# EAGLE board wheel_board_front (EAGLE 9.5.0)
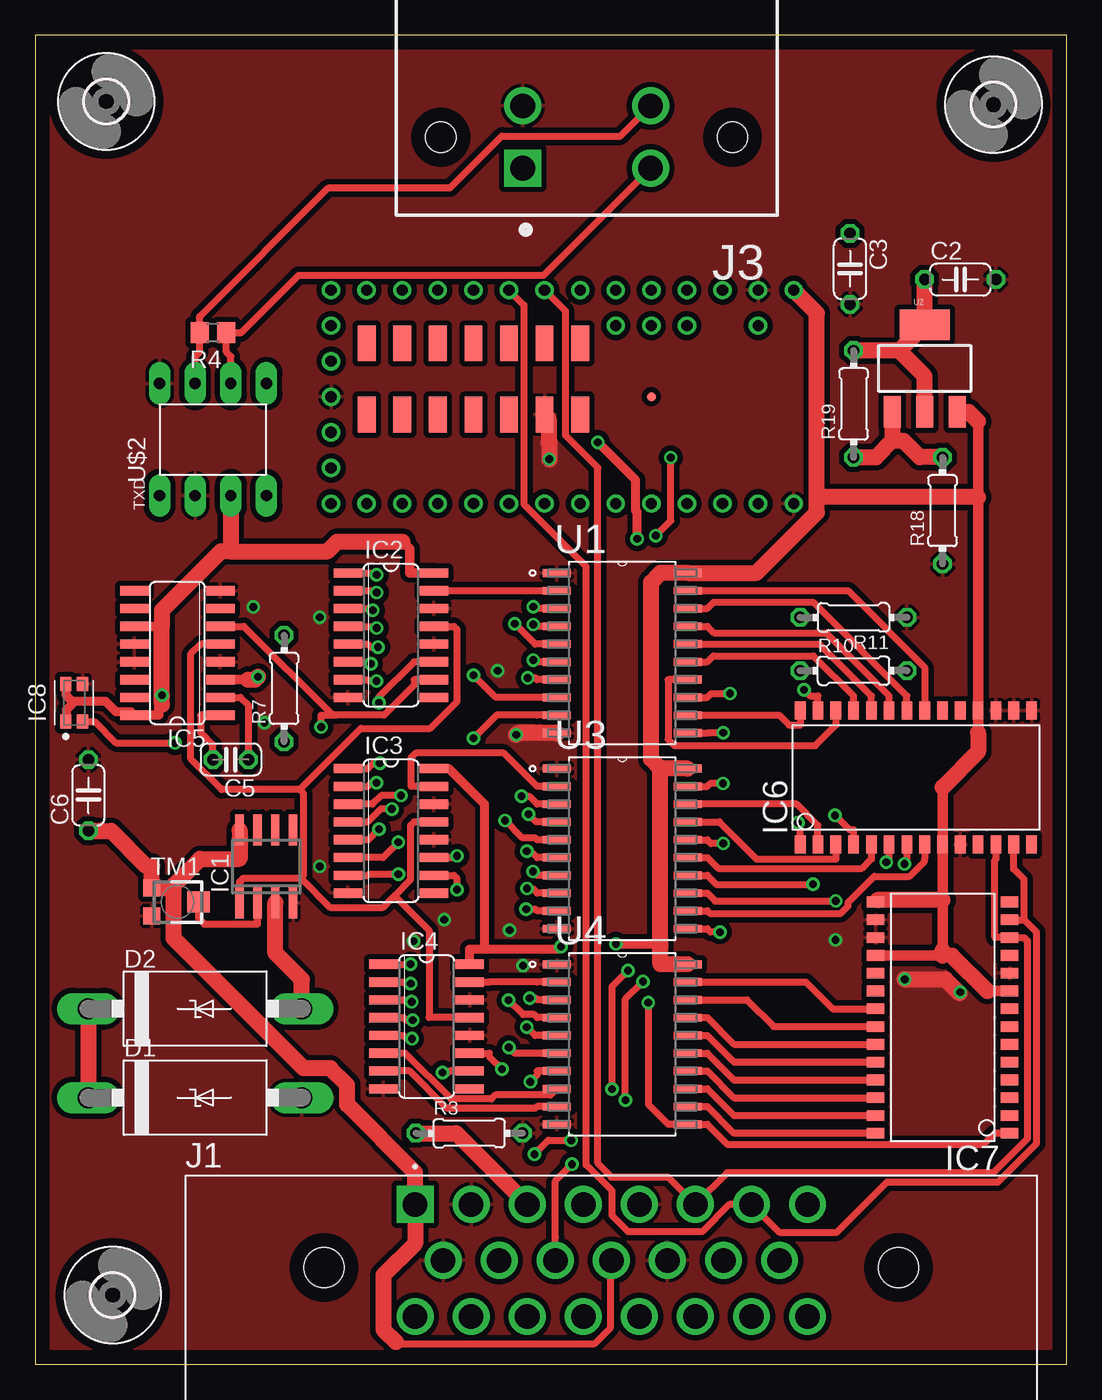
[diagram p0: board, top side]
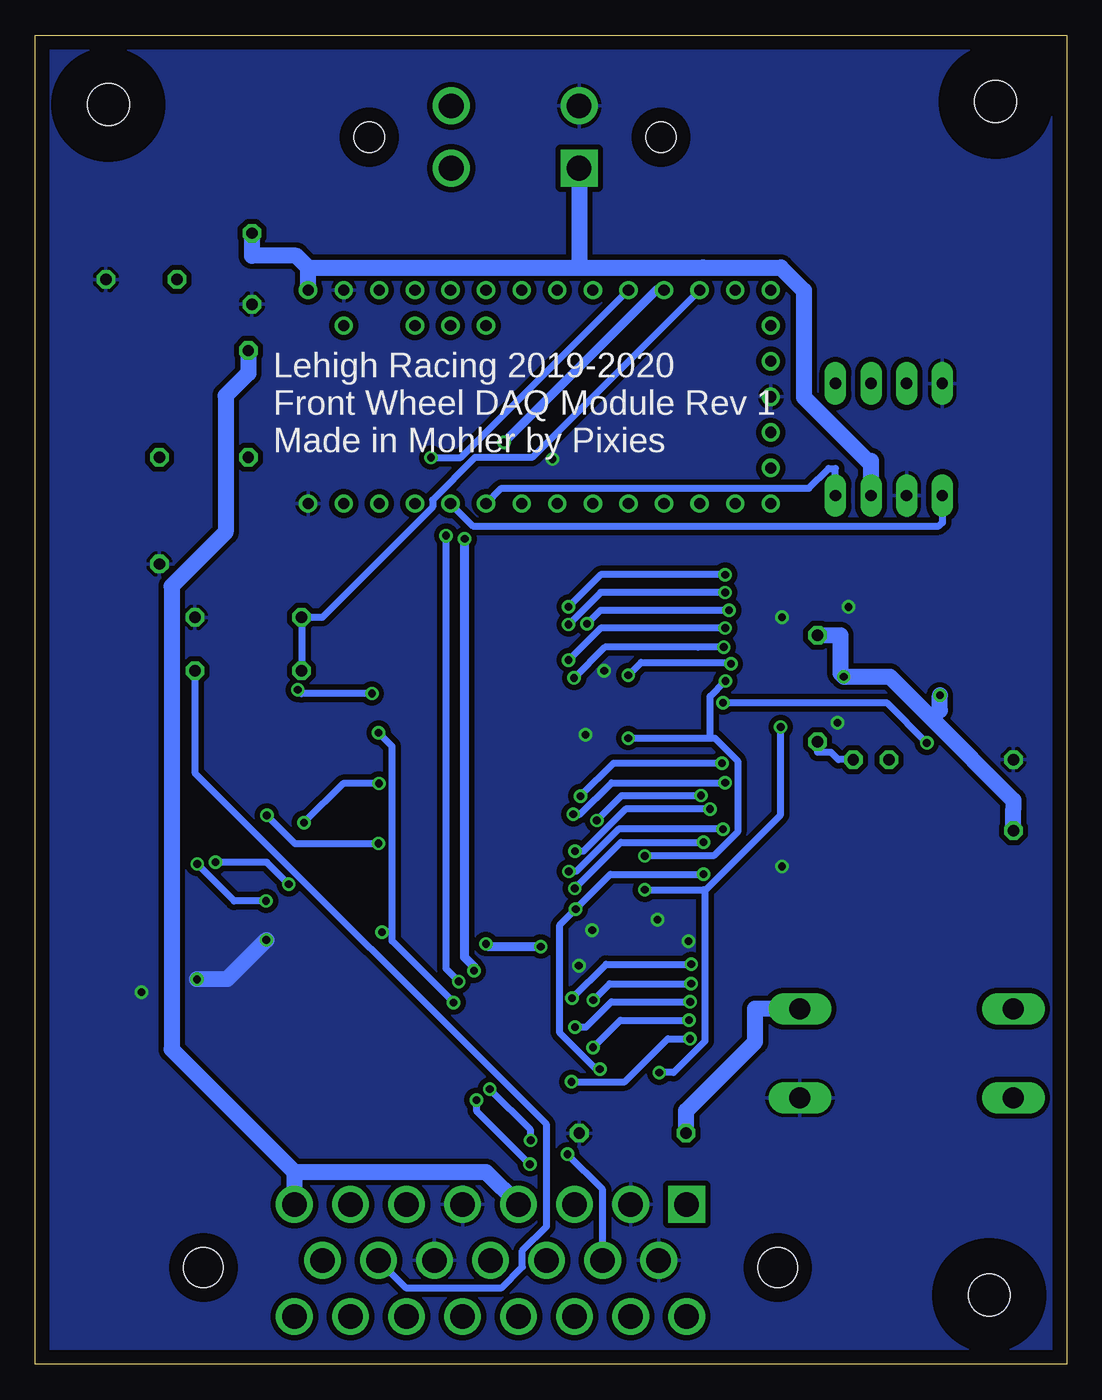
[diagram p1: board, bottom side, seen from below]

Size 73.64 x 94.92 mm. Coordinates in mm from the lower left corner, seen from the top.
Outline: 0,0 73.64,0 73.64,94.92 0,94.92 0,0
Copper layers (1*16): Top 0.035mm / dielectric 1.5mm / Bottom 0.035mm
Design rules "default *": minimum track width 6mil, minimum drill 0.55mm, track to track 6mil, track to pad 6mil, pad to pad 6mil, via to via 6mil, smd to smd 6mil, copper to edge 40mil, drill to drill 6mil, minimum pad ring 10mil, minimum via ring 8mil, stop-mask expansion 4mil, vias tented up to drill 0mil, thermal gap 10mil
Net classes: 0 default: width 0.508 mm, drill 0.55 mm; 1 pwr: width 0.635 mm, clearance 0.381 mm

## Footprints (pad centres in the part's own frame; a part is rotated, then mirrored left to right if it is on the bottom)
C050-024X044 = drill 0.813 octagon: 1 -2.54,0; 2 2.54,0
C025-024X044 = drill 0.813 octagon: 1 -1.27,0; 2 1.27,0
C4111-15 = drill 1.499 long: A 7.62,0; C -7.62,0
3,0 = hole 3: 0,0
SO08 = smd 0.6 x 2.2: 1 -1.905,-2.6; 2 -0.635,-2.6; 3 0.635,-2.6; 4 1.905,-2.6; 5 1.905,2.6; 6 0.635,2.6; 7 -0.635,2.6; 8 -1.905,2.6
SO16 = smd 0.66 x 2.032: 1 -4.445,-3.073; 2 -3.175,-3.073; 3 -1.905,-3.073; 4 -0.635,-3.073; 5 0.635,-3.073; 6 1.905,-3.073; 7 3.175,-3.073; 8 4.445,-3.073; 9 4.445,3.073; 10 3.175,3.073; 11 1.905,3.073; 12 0.635,3.073; 13 -0.635,3.073; 14 -1.905,3.073; 15 -3.175,3.073; 16 -4.445,3.073
SO28W = smd 0.762 x 1.27: 1 -7.62,-4.78; 2 -6.35,-4.78; 3 -5.08,-4.78; 4 -3.81,-4.78; 5 -2.54,-4.78; 6 -1.27,-4.78; 7 0,-4.78; 8 1.27,-4.78; 9 2.54,-4.78; 10 3.81,-4.78; 11 5.08,-4.78; 12 6.35,-4.78; 13 7.62,-4.78; 14 8.89,-4.78; 15 8.89,4.78; 16 7.62,4.78; 17 6.35,4.78; 18 5.08,4.78; 19 3.81,4.78; 20 2.54,4.78; 21 1.27,4.78; 22 0,4.78; 23 -1.27,4.78; 24 -2.54,4.78; 25 -3.81,4.78; 26 -5.08,4.78; 27 -6.35,4.78; 28 -7.62,4.78
DFN320X150X100-4N = smd 1 x 0.8: CLKOE 1.35,0.6; CLKOUT -1.35,-0.6; GND 1.35,-0.6; VDD -1.35,0.6
TE_1-776087-1 = drill 1.75 square: 1 0,0 | drill 1.75: 2 4,0; 3 8,0; 4 12,0; 5 16,0; 6 20,0; 7 24,0; 8 28,0; 9 2,-4; 10 6,-4; 11 10,-4; 12 14,-4; 13 18,-4; 14 22,-4; 15 26,-4; 16 0,-8; 17 4,-8; 18 8,-8; 19 12,-8; 20 16,-8; 21 20,-8; 22 24,-8; 23 28,-8 | hole 2.85: -6.5,-4.5; 34.5,-4.5
TE_DTF13-4P = drill 1.76 square: 1 4.561,2.223 | drill 1.76: 2 4.561,-2.227; 3 -4.559,-2.227; 4 -4.559,2.223 | hole 2.16: -10.415,0; 10.415,0
0204/7 = drill 0.813 octagon: 1 -3.81,0; 2 3.81,0
R0805 = smd 1.3 x 1.5: 1 -0.95,0; 2 0.95,0
TC33X = smd 1.2 x 1.2: 1 -1,-1.825; 3 1,-1.825 | smd 1.5 x 1.6: 2 0,1.5
SOIC127P1030X265-20N = smd 1.981 x 0.559: 1 -4.674,5.715; 2 -4.674,4.445; 3 -4.674,3.175; 4 -4.674,1.905; 5 -4.674,0.635; 6 -4.674,-0.635; 7 -4.674,-1.905; 8 -4.674,-3.175; 9 -4.674,-4.445; 10 -4.674,-5.715; 11 4.674,-5.715; 12 4.674,-4.445; 13 4.674,-3.175; 14 4.674,-1.905; 15 4.674,-0.635; 16 4.674,0.635; 17 4.674,1.905; 18 4.674,3.175; 19 4.674,4.445; 20 4.674,5.715
SOT223 = smd 1.219 x 2.235: 1 -2.311,-3.099; 2 0,-3.099; 3 2.311,-3.099 | smd 3.6 x 2.2: 4 0,3.099
MCP2561_PDIP = drill 0.813 pad 1.524 long: CANH 4,1.27; CANL 4,-1.27; RXD -4,-3.81; SPLIT 4,-3.81; STBY 4,3.81; TXD -4,3.81; VDD -4,-1.27; VSS -4,1.27
TEENSY3.1_ALL = drill 0.8: 3.3V@1 2.54,5.08; 3.3V@2 -7.62,-22.86; A10 0,0; A11 0,-2.54; A14/DAC 0,-22.86; AGND 2.54,7.62; AREF 0,2.54; D0 -12.7,7.62; D1 -12.7,5.08; D2 -12.7,2.54; D3 -12.7,0; D4 -12.7,-2.54; D5 -12.7,-5.08; D6 -12.7,-7.62; D7 -12.7,-10.16; D8 -12.7,-12.7; D9 -12.7,-15.24; D10 -12.7,-17.78; D11 -12.7,-20.32; D12 -12.7,-22.86; D13/LED 2.54,-22.86; D14/A0 2.54,-20.32; D15/A1 2.54,-17.78; D16/A2 2.54,-15.24; D17/A3 2.54,-12.7; D18/A4 2.54,-10.16; D19/A5 2.54,-7.62; D20/A6 2.54,-5.08; D21/A7 2.54,-2.54; D22/A8 2.54,0; D23/A9 2.54,2.54; GND@1 -12.7,10.16; GND@2 -5.08,-22.86; PROGRAM -2.54,-22.86; VBAT -10.16,-22.86; VIN 2.54,10.16; VUSB 0,7.62 | smd 2.54 x 1.27 bottom: 3.3V@3 -1.27,-7.62; A12 -6.35,-5.08; A13 -1.27,-5.08; D24 -6.35,-10.16; D25 -6.35,-12.7; D26/A15 -6.35,-15.24; D27/A16 -6.35,-17.78; D28/A17 -6.35,-20.32; D29/A18 -1.27,-20.32; D30/A19 -1.27,-17.78; D31/A20 -1.27,-15.24; D32 -1.27,-12.7; D33 -1.27,-10.16; GND@3 -6.35,-7.62 | smd 0.635 x 0.635 bottom: RESET -5.08,0

## Placement (x,y rotation side)
C2  10u  [C050-024X044]  66.04,77.47 0 top
C3  [C050-024X044]  58.17,78.23 270 top
C5  2.2n  [C025-024X044]  13.97,43.18 180 top
C6  [C050-024X044]  3.81,40.64 90 top
D1  1N5908  [C4111-15]  11.43,19.05 0 top
D2  1N5908  [C4111-15]  11.43,25.4 0 top
H2  MOUNT-HOLE3.0  [3,0]  5.54,4.95 0 top
H3  MOUNT-HOLE3.0  [3,0]  68.41,89.95 0 top
H4  MOUNT-HOLE3.0  [3,0]  5.08,90.17 0 top
IC1  LM2903D  [SO08]  16.51,35.56 0 top
IC2  74HC590D  [SO16]  25.4,52.07 270 top
IC3  74HC590D  [SO16]  25.4,38.1 270 top
IC4  74HC590D  [SO16]  27.94,24.13 270 top
IC5  4098D  [SO16]  10.16,50.8 90 top
IC6  MCP23017SO  [SO28W]  62.23,41.91 0 top
IC7  MCP23017SO  [SO28W]  64.77,24.13 90 top
IC8  OV-0100-C7OV-0100-C7  [DFN320X150X100-4N]  2.79,47.24 90 top
J1  1-776087-1  [TE_1-776087-1]  27.13,11.43 0 top
J3  DTF13-4P  [TE_DTF13-4P]  39.37,87.63 180 top
R3  4.7k  [0204/7]  30.99,16.51 0 top
R4  120  [R0805]  12.7,73.66 180 top
R7  4.7k  [0204/7]  17.78,48.26 90 top
R10  100k  [0204/7]  58.42,49.53 0 top
R11  180k  [0204/7]  58.42,53.34 180 top
R18  12k  [0204/7]  64.77,60.96 90 top
R19  10k  [0204/7]  58.42,68.58 90 top
TM1  [TC33X]  10.16,33.02 270 top
U1  SN74HC573ADW  [SOIC127P1030X265-20N]  41.91,50.8 0 top
U2  LM1117  [SOT223]  63.5,71.12 0 top
U3  SN74HC573ADW  [SOIC127P1030X265-20N]  41.91,36.83 0 top
U4  SN74HC573ADW  [SOIC127P1030X265-20N]  41.91,22.86 0 top
U$2  MCP2561MCP  [MCP2561_PDIP]  12.7,66.04 90 top
U$3  TEENSY3.1_ALL  [TEENSY3.1_ALL]  43.99,74.17 90 bottom

## Library data of the parts
C2 C3 C5 C6 = rcl; SPICEPREFIX: C
D1 D2 = diode
H2-H4 = holes
IC1 = linear
IC2-IC4 = 74xx-eu
IC5 = 40xx
IC6 IC7 TM1 = adafruit
IC8 = OV-0100-C7
J1 = 1-776087-1; AVAILABILITY: Unavailable; COMMENT: 1-776087-1; DESCRIPTION: AMPSEAL Series; 4mm Pitch 23 Way 3 Row Right Angle PCB Header; Solder Term; 8A; EU_ROHS_COMPLIANCE: Compliant; MF: TE Connectivity; MP: 1-776087-1; PACKAGE: None; PRICE: None; TE_PURCHASE_URL: https://www.te.com/usa-en/product-1-776087-1.html?te_bu=Cor&te_type=disp&te_campaign=seda_glo_cor-seda-global-disp-prtnr-fy19-seda-model-bom-cta_sma-317_1&elqCampaignId=32493
J3 = DTF13-4P; AVAILABILITY: In stock; MF: TE Connectivity; MPN: DTF13-4P; PARTREV: NC; STANDARD: Manufacturer recommendation
R3 R7 R10 R11 R18 R19 = rcl; SPICEPREFIX: R
R4 = eagle-ltspice; SPICEMODEL: NONE; SPICEPREFIX: R
U1 U3 U4 = SN74HC573ADW; AVAILABILITY: Unavailable; DESCRIPTION: Octal Transparent D-Type Latches With 3-State Outputs 20-SOIC -40 to 85; MF: Texas Instruments; MP: SN74HC573ADW; PACKAGE: SOIC-20 Texas Instruments; PRICE: None
U2 = SparkFun-IC-Power; PROD_ID: VREG-08170
U$2 = PoJD
U$3 = Teensy3.1

## Nets
2.6V [pwr]: C2.1 J1.4 J1.8 R19.2 U2.2 U2.4
A0: U$3.D14/A0
A1: R10.1 R11.2 U$3.D15/A1
CAN-RX: U$2.RXD U$3.D4
CAN-TX: U$2.TXD U$3.D3
CAN_H: J3.3 R4.2 U$2.CANH
CAN_L: J3.4 R4.1 U$2.CANL
GND [pwr]: C2.2 C3.2 C6.2 D1.A IC1.4 IC2.8 IC2.12 IC2.14 IC3.8 IC3.12 IC3.14 IC4.8 IC4.12 IC4.14 IC5.4 IC5.8 IC5.12 IC5.13 IC6.10 IC6.15 IC6.16 IC6.17 IC7.10 IC7.16 IC7.17 IC8.GND J1.2 J1.5 J1.9 J1.13 J3.2 R3.2 R11.1 R18.1 TM1.3 U1.1 U1.10 U3.1 U3.10 U4.1 U4.10 U$2.STBY U$2.VSS U$3.AGND U$3.GND@1 U$3.GND@2 U$3.GND@3
N$1 [pwr]: D2.A IC1.3 J1.3 R3.1
N$2: J1.14 R10.2
N$3: IC1.2 TM1.2
N$4: C5.1 IC5.2 R7.1
N$5: IC2.15 U1.2
N$8: C5.2 IC5.1
N$9: IC1.1 IC2.13 IC3.13 IC4.13 IC5.5
N$10: IC2.7 IC3.11 U1.9
N$11: IC3.7 IC4.11 U3.9
N$12: IC2.1 U1.3
N$13 [pwr]: D1.C D2.C
N$14 [pwr]: R18.2 R19.1 U2.1
N$15: IC2.2 U1.4
N$16: IC2.3 U1.5
N$17: IC2.4 U1.6
N$18: IC2.5 U1.7
N$19: IC2.6 U1.8
N$20: IC3.15 U3.2
N$21: IC3.1 U3.3
N$22: IC3.2 U3.4
N$23: IC3.3 U3.5
N$24: IC3.4 U3.6
N$25: IC3.5 U3.7
N$26: IC3.6 U3.8
N$27: IC4.15 U4.2
N$28: IC4.1 U4.3
N$29: IC4.2 U4.4
N$30: IC4.3 U4.5
N$31: IC4.4 U4.6
N$32: IC4.5 U4.7
N$33: IC4.6 U4.8
N$34: IC4.7 U4.9
N$35: IC6.21 U1.19
N$36: IC6.22 U1.18
N$37: IC6.23 U1.17
N$38: IC6.24 U1.16
N$39: IC6.25 U1.15
N$40: IC6.26 U1.14
N$41: IC6.27 U1.13
N$42: IC6.28 U1.12
N$43: IC6.1 U3.19
N$44: IC6.2 U3.18
N$45: IC6.3 U3.17
N$46: IC6.4 U3.16
N$47: IC6.5 U3.15
N$48: IC6.6 U3.14
N$49: IC6.7 U3.13
N$50: IC6.8 U3.12
N$51: IC7.21 U4.19
N$52: IC7.22 U4.18
N$53: IC7.23 U4.17
N$54: IC7.24 U4.16
N$55: IC7.25 U4.15
N$56: IC7.26 U4.14
N$57: IC7.27 U4.13
N$58: IC7.28 U4.12
SCL0: IC6.12 IC7.12 J1.6 U$3.D19/A5
SCL1: J1.10 U$3.D16/A2
SDA0: IC6.13 IC7.13 J1.7 U$3.D18/A4
SDA1: J1.11 U$3.D17/A3
VDD_3V3: U$2.SPLIT
VIN [pwr]: C3.1 C6.1 IC1.8 IC2.16 IC3.16 IC4.16 IC5.3 IC5.11 IC5.16 IC6.9 IC6.18 IC7.9 IC7.15 IC7.18 IC8.CLKOE IC8.VDD J1.1 J1.12 J3.1 R7.2 TM1.1 U1.20 U2.3 U3.20 U4.20 U$2.VDD U$3.VIN
WSS_CLK: IC2.11 IC8.CLKOUT
WSS_DELAY: IC2.10 IC3.10 IC4.10 IC5.6
WSS_LATCH_EN: IC7.1 U1.11 U3.11 U4.11

## Tracks (layer width: path | path; a pad name or v marks a point on that pad's centre or on a via)
2.6V
  Top 1.143: U2.4 | U2.4 C2.1 | 61.67,72.39 R19.2 | U2.4 61.67,72.39 | U2.2 63.5,70.56 61.67,72.39 | U2.4
  Bottom 1.143: 55.13,13.76 J1.8 | 55.13,13.76 63.89,22.51 63.89,55.57 60.03,59.43 60.03,69.16 58.42,70.78 R19.2 | 55.13,13.76 41.45,13.76 J1.4
A1
  Bottom 0.508: U$3.D15/A1 38.17,64.75 42.24,64.75 45.26,61.73 45.26,61.22 53.14,53.34 R11.2 R10.1
CAN-RX
  Bottom 0.508: U$2.RXD 16.51,63.97 16.99,63.97 18.4,62.56 40.35,62.56 U$3.D4
CAN-TX
  Bottom 0.508: U$2.TXD 8.89,60.11 9.12,59.88 42.4,59.88 U$3.D3
CAN_H
  Top 0.508: U$2.CANH 11.43,71.97 11.75,72.29 R4.2 11.75,74.82 20.94,84.01 29.63,84.01 33.32,87.7 41.77,87.7 J3.3
CAN_L
  Top 0.508: J3.4 36.29,77.77 18.82,77.77 14.71,73.66 R4.1 13.65,72.29 13.97,71.97 U$2.CANL
GND  (via drill 0.55)
  Top 1.143: U$3.GND@3 36.66,67.53 36.66,65.83 36.7,65.79 v36.7,64.64 | U1.10 34.46,45.09 v34.34,44.97 | v62.07,27.5 64.98,27.5 65.97,26.51
  Bottom 1.143: v57.13,30.31 59.95,27.5 v62.07,27.5
  other vias: 33.02,49.53 20.32,53.34 29.21,31.75 20.32,35.56 33.88,31.01 15.58,54.08 16.37,45.82 66.03,26.58 27.01,30.22 34.83,28.48
  pour Bottom: 0,95.25 73.66,95.25 73.66,0 0,0
  pour Top: 0,95.25 73.66,95.25 73.66,0 0,0
N$1
  Top 1.143: D2.A 19.05,27.48 17.14,29.38 IC1.3 | R3.1 30.05,16.51 J1.3
  Bottom 1.143: R3.1 27.18,18.12 22.25,23.05 22.25,25.4 D2.A
N$2
  Bottom 0.508: R10.2 62.23,48.46 62.23,42.23 37.13,17.13 37.13,9.86 38.85,8.14 38.85,6.96 40.32,5.48 47.18,5.48 J1.14
N$3
  Top 0.508: IC1.2 15.88,31.45 12.07,31.45 11.66,31.86 TM1.2
N$4
  Top 0.508: IC5.2 14.66,47.62 15.24,47.04 C5.1
  Bottom 0.508: C5.1 16.31,43.18 16.84,43.71 17.78,43.71 R7.1
N$5
  Top 0.508: IC2.15 U1.2
N$8
  Top 0.508: C5.2 12.7,44.25 11.81,45.14 11.81,46.35 IC5.1
N$9
  Top 0.508: 18.88,41.05 23.25,45.42 28.19,45.42 30.12,47.35 30.12,52.48 29.9,52.7 IC2.13 | 18.96,34.73 19.17,34.94 19.17,40.76 18.88,41.05 | 18.88,41.05 13.32,41.05 11.12,43.24 11.12,50.75 11.81,51.44 IC5.5 | 18.96,34.73 21.05,32.65 24.84,32.65 25.48,33.28 25.66,33.46 | 18.96,34.73 14.87,34.73 14.61,34.47 IC1.1 | 25.66,33.46 26.82,34.62 26.82,38.5 27.05,38.73 IC3.13 | 25.66,33.46 28.12,31 28.12,24.77 IC4.13
N$10  (via drill 0.55 pad 0.96)
  Top 0.508: IC2.7 23.75,48.9 23.85,48.8 v24.37,48.8 | IC3.11 29.9,36.2 30.01,36.31 v30.12,36.31 | v31.3,44.72 32.94,46.35 35.84,46.35 U1.9
  Bottom 0.508: 25.46,44.72 25.12,44.72 23.5,43.1 23.5,38.01 25.2,36.31 v30.12,36.31 | v31.3,44.72 25.46,44.72 | 25.46,44.72 25.46,47.71 v24.37,48.8
N$11  (via drill 0.55 pad 0.96)
  Top 0.508: IC3.7 23.75,34.92 23.82,35 v25.93,35 | IC4.11 32.44,22.23 32.44,21.97 v33.33,21.08 | U3.9 36.59,32.38 35.84,32.38 35.71,32.51 v35.05,32.51
  Bottom 0.508: v33.33,21.08 33.58,21.08 36.22,23.72 36.22,31.34 v35.05,32.51 32.57,35 v25.93,35
N$12  (via drill 0.55 pad 0.96)
  Top 0.508: U1.3 35.84,53.98 35.71,54.1 v35.56,54.1 | IC2.1 24.26,56.52 v24.38,56.39
  Bottom 0.508: v24.38,56.39 33.27,56.39 v35.56,54.1
N$13
  Top 1.143: D2.C D1.C
N$14
  Top 1.143: 61.19,65.95 61.98,65.95 63.16,64.77 R18.2 | 61.19,65.95 61.19,66.33 U2.1 | 61.19,65.95 60.03,64.8 60.03,64.77 R19.1
N$15  (via drill 0.55 pad 0.96)
  Top 0.508: U1.4 35.84,52.7 35.71,52.83 v35.56,52.83 | IC2.2 24.26,55.24 v24.38,55.12
  Bottom 0.508: v24.38,55.12 33.27,55.12 v35.56,52.83
N$16  (via drill 0.55 pad 0.96)
  Top 0.508: IC2.3 23.75,53.98 23.88,53.85 v24.1,53.85 | U1.5 35.69,51.44 v34.24,52.88
  Bottom 0.508: v34.24,52.88 33.27,53.85 v24.1,53.85
N$17  (via drill 0.55 pad 0.96)
  Top 0.508: U1.6 35.84,50.16 35.71,50.29 v35.56,50.29 | IC2.4 24.26,52.7 v24.38,52.58
  Bottom 0.508: v24.38,52.58 33.27,52.58 v35.56,50.29
N$18  (via drill 0.55, 0.55 pad 0.96)
  Top 0.508: U1.7 35.84,48.9 35.72,49.02 v35.16,49.02 | IC2.5 23.75,51.44 23.98,51.21 24.47,51.21 v24.48,51.22
  Bottom 0.508: v35.16,49.02 32.97,51.21 26.34,51.21 26.32,51.22 v24.48,51.22
N$19  (via drill 0.55 pad 0.96)
  Top 0.508: IC2.6 23.75,50.16 23.89,50.03 v23.98,50.03 | U1.8 32.88,47.62 v31.3,49.21
  Bottom 0.508: v31.3,49.21 30.39,50.12 24.07,50.12 v23.98,50.03
N$20
  Top 0.508: IC3.15 26.82,41.27 26.82,43.31 27.17,43.66 33.46,43.66 35.84,41.27 U3.2
N$21  (via drill 0.55 pad 0.96)
  Top 0.508: v34.72,40.58 35.27,40.58 35.84,40.01 U3.3 | IC3.1 23.75,42.55 24.13,42.92 v24.61,42.92
  Bottom 0.508: v24.61,42.92 32.37,42.92 v34.72,40.58
N$22  (via drill 0.55 pad 0.96)
  Top 0.508: v24.38,41.53 24.01,41.53 23.75,41.27 IC3.2 | v24.38,41.53 | U3.4 35.77,38.73 v35.23,39.28
  Bottom 0.508: v35.23,39.28 34.75,39.28 32.49,41.53 v24.38,41.53
N$23  (via drill 0.55 pad 0.96)
  Top 0.508: U3.5 35.84,37.47 35.7,37.61 34.78,37.61 v33.55,38.84 | v26.11,40.62 24.7,40.62 24.09,40.01 IC3.3
  Bottom 0.508: v33.55,38.84 31.77,40.62 v26.11,40.62
N$24  (via drill 0.55 pad 0.96)
  Top 0.508: IC3.4 23.75,38.73 24.67,39.66 v25.47,39.66 | U3.6 35.84,36.2 35.4,36.64 v35.1,36.64
  Bottom 0.508: v25.47,39.66 31.48,39.66 34.5,36.64 v35.1,36.64
N$25  (via drill 0.55 pad 0.96)
  Top 0.508: U3.7 35.84,34.92 35.56,35.2 v35.54,35.2 | v24.54,38.22 23.79,37.47 IC3.5
  Bottom 0.508: v24.54,38.22 31.99,38.22 35,35.2 v35.54,35.2
N$26  (via drill 0.55 pad 0.96)
  Top 0.508: U3.8 35.84,33.66 35.51,33.99 v35.12,33.99 | v25.93,37.28 24.84,36.2 IC3.6
  Bottom 0.508: v35.12,33.99 31.83,37.28 v25.93,37.28
N$27
  Top 0.508: IC4.15 32.44,27.3 35.84,27.3 U4.2
N$28  (via drill 0.55, 0.55 pad 0.96)
  Top 0.508: U4.3 35.84,26.04 35.71,26.16 v35.31,26.16 | IC4.1 v26.8,28.57 v26.8,28.58
  Bottom 0.508: v26.8,28.58 32.89,28.58 v35.31,26.16
N$29  (via drill 0.55 pad 0.96)
  Top 0.508: U4.4 35.84,24.77 35.62,24.98 34.83,24.98 v33.8,26.01 | IC4.2 26.29,27.3 26.41,27.19 v26.81,27.19
  Bottom 0.508: v33.8,26.01 32.62,27.19 v26.81,27.19
N$30  (via drill 0.55 pad 0.96)
  Top 0.508: IC4.3 26.29,26.04 26.43,25.89 v26.88,25.89 | U4.5 35.69,23.5 v35.09,24.1
  Bottom 0.508: v35.09,24.1 34.3,24.1 32.51,25.89 v26.88,25.89
N$31  (via drill 0.55 pad 0.96)
  Top 0.508: IC4.4 26.29,24.77 26.47,24.58 v26.96,24.58 | U4.6 34.23,22.23 v33.81,22.64
  Bottom 0.508: v33.81,22.64 31.87,24.58 v26.96,24.58
N$32  (via drill 0.55 pad 0.96)
  Top 0.508: v26.9,23.25 26.53,23.25 26.29,23.5 IC4.5 | U4.7 35.84,20.95 35.84,20.67 v35.35,20.18
  Bottom 0.508: v35.35,20.18 31.55,20.18 28.48,23.25 v26.9,23.25
N$33
  Top 0.508: U4.8 36.8,19.25 32.86,19.25 32.56,18.95 29.7,18.95 26.42,22.23 IC4.6
N$34
  Top 0.508: U4.9 35.84,18.41 35.71,18.29 29.4,18.29 26.73,20.95 IC4.7
N$35
  Top 0.508: U1.19 58.02,55.24 63.5,49.77 IC6.21
N$36
  Top 0.508: IC6.22 62.23,47.73 55.53,54.43 48.44,54.43 47.98,53.98 U1.18
N$37
  Top 0.508: IC6.23 60.96,47.73 56.45,52.24 48.45,52.24 47.98,52.7 U1.17
N$38
  Top 0.508: IC6.24 59.69,47.73 55.99,51.44 U1.16
N$39
  Top 0.508: IC6.25 58.42,47.73 55.55,50.6 48.41,50.6 47.98,50.16 U1.15
N$40
  Top 0.508: IC6.26 57.15,45.65 55.69,44.19 45.62,44.19 45.19,44.62 45.19,48.9 U1.14
N$41  (via drill 0.55 pad 0.96)
  Top 0.508: U1.13 47.98,47.62 48.26,47.9 v49.6,47.9 | IC6.27 55.88,47.73 55.33,47.73 v54.89,48.16
  Bottom 0.508: v49.6,47.9 54.63,47.9 v54.89,48.16
N$42
  Top 0.508: IC6.28 54.61,45.65 53.82,45.65 53.12,46.35 U1.12
N$43  (via drill 0.55 pad 0.96)
  Top 0.508: U3.19 47.98,41.27 48.19,41.48 v49.09,41.48 | IC6.1 54.61,38.17 54.44,38.34 v54.44,38.68
  Bottom 0.508: v49.09,41.48 51.64,41.48 v54.44,38.68
N$44
  Top 0.508: U3.18 54.37,40.01 55.88,38.5 55.88,38.17 IC6.2
N$45
  Top 0.508: IC6.3 57.15,36.09 51.49,36.09 48.84,38.73 U3.17
N$46  (via drill 0.55 pad 0.96)
  Top 0.508: IC6.4 58.42,38.17 58.13,38.17 v57.1,39.2 | U3.16 47.98,37.47 48.25,37.2 v49.12,37.2
  Bottom 0.508: v57.1,39.2 55.09,37.2 v49.12,37.2
N$47
  Top 0.508: IC6.5 59.69,36.09 59.03,35.43 48.75,35.43 47.98,36.2 U3.15
N$48  (via drill 0.55 pad 0.96)
  Top 0.508: U3.14 47.98,34.92 48.62,34.29 v55.53,34.29 | v60.75,35.85 60.96,36.06 IC6.6
  Bottom 0.508: v55.53,34.29 57.1,35.85 v60.75,35.85
N$49  (via drill 0.55 pad 0.96)
  Top 0.508: U3.13 47.98,33.66 48.54,33.09 v57.15,33.09 | IC6.7 62.23,35.9 v62.06,35.73
  Bottom 0.508: v57.15,33.09 59.42,33.09 v62.06,35.73
N$50
  Top 0.508: U3.12 47.98,32.38 48.16,32.21 57.52,32.21 58.03,32.73 58.03,32.98 59.9,34.85 62.43,34.85 63.5,35.92 63.5,36.09 IC6.8
N$51
  Top 0.508: U4.19 55.02,27.3 56.92,25.4 IC7.21
N$52
  Top 0.508: U4.18 50.81,26.04 52.71,24.13 IC7.22
N$53
  Top 0.508: U4.17 47.98,24.77 49.89,22.86 IC7.23
N$54
  Top 0.508: U4.16 47.98,23.5 49.89,21.59 IC7.24
N$55
  Top 0.508: U4.15 47.98,22.23 49.89,20.32 IC7.25
N$56
  Top 0.508: U4.14 47.98,20.95 49.89,19.05 IC7.26
N$57
  Top 0.508: U4.13 47.98,19.68 49.89,17.78 IC7.27
N$58
  Top 0.508: IC7.28 58.95,16.51 49.89,16.51 47.98,18.41 U4.12
SCL0
  Top 0.508: U$3.D19/A5 37.87,75.21 37.87,66.33 40.17,64.03 40.17,14.35 41.12,13.39 45.16,13.39 J1.6 49.4,13.7 68.4,13.7 70.82,16.12 70.82,30.25 70.59,30.48 IC7.12 69.03,30.48 68.51,30.48 68.51,36.02 68.58,36.09 IC6.12
SCL1  (via drill 0.55)
  Top 0.508: v35.64,15.01 36.64,16.01 v38.26,16.01 | v41.19,19.66 41.19,26.98 v42.32,28.11
  Top 0.635: v42.97,58.94 42.97,60.89 42.86,61 42.86,63.14 v40.16,65.85
  Bottom 0.508: J1.10 33.13,12.5 v35.64,15.01 | v38.26,16.01 38.26,16.73 v41.19,19.66
  Bottom 0.635: v42.97,58.94 42.97,29.07 42.32,28.41 v42.32,28.11 | v40.16,65.85 29.3,76.71 U$3.D16/A2
SDA0
  Top 0.508: 70.59,31.75 71.49,30.85 71.49,15.79 68.73,13.03 60.82,13.03 57.23,9.44 53.12,9.44 J1.7 49.56,11.43 47.61,9.48 42.32,9.48 41.18,10.62 41.18,12.4 39.34,14.25 39.34,56.97 34.89,61.42 34.89,61.69 34.89,75.65 U$3.D18/A4 | IC7.13 70.59,31.75 | 70.59,31.75 70.59,34.64 69.85,35.38 IC6.13
SDA1  (via drill 0.55)
  Top 0.508: J1.11 37.13,9.11 37.13,13.1 v38.32,14.29 | v42.14,18.88 42.14,26.09 v43.4,27.35 | v44.3,59.18 45.37,60.25 v45.37,64.75
  Bottom 0.508: v42.14,18.88 42.14,18.11 v38.32,14.29 | v43.4,27.35 44.3,28.25 v44.3,59.18 | v45.37,64.75 43.24,64.75 U$3.D17/A3
VIN  (via drill 0.55, 0.55 pad 0.96)
  Top 0.508: J1.12 41.08,7.38 41.08,2.62 39.94,1.48 25.87,1.48 25.77,1.59
  Top 0.635: IC5.16 6.84,46.6 5.78,46.6 5.04,47.34 2.65,47.34 | 2.65,47.34 2.24,47.75 2.24,48.55 IC8.CLKOE | 2.65,47.34 2.65,47.15 2.24,46.74 2.24,45.94 IC8.VDD | IC4.16 31.01,29.66 32.09,29.66 | 32.09,29.66 32.09,39.99 29.54,42.55 IC3.16 | v37.55,29.84 37.37,29.66 34.89,29.66 32.09,29.66 | v41.46,30.03 44.64,30.03
  Top 0.66: IC5.16 8.81,46.35 8.81,46.86 9.05,47.1 | 15.2,48.9 IC5.3 | 9.05,52.7 IC5.11 | IC2.16 26.75,56.52 26.75,58.24 26.24,58.74
  Top 0.762: 64.77,29.56 64.77,33.16 IC6.9 64.77,41.21 | 60.13,33.16 IC7.15 | 64.77,29.21 61.39,29.21 IC7.18 | 65.44,29.19 64.77,29.19 | 67.96,26.67 IC7.9 | 67.31,67.32 67.31,61.93 IC6.18 67.31,45.1
  Top 1.143: C6.1 | C6.1 | C6.1 | C6.1 3.82,38.1 3.83,38.1 3.86,38.1 3.91,38.1 4.01,38.1 4.21,38.1 4.62,38.1 5.42,38.1 7.95,35.57 8.34,35.57 TM1.1 9.89,34.02 | 9.05,47.1 v9.05,47.78 9.05,52.7 9.05,53.83 13.27,58.05 13.97,58.05 | 15.2,48.9 15.71,48.9 v15.92,49.11 | 64.77,33.16 60.13,33.16 | 26.24,58.74 21.56,58.74 20.86,58.05 13.97,58.05 | 13.97,58.05 13.97,59.56 U$2.VDD | 64.77,29.56 64.77,29.21 64.77,29.19 | 67.96,26.67 65.44,29.19 | 44.64,42.55 44.64,30.03 44.64,29.78 44.64,28.57 U4.20 | 44.64,42.55 43.97,43.22 43.97,55.84 44.64,56.52 U1.20 51.48,56.52 55.8,60.84 55.8,61.93 | U3.20 44.64,42.55 | 67.31,61.93 55.8,61.93 | 55.8,61.93 55.8,75.06 U$3.VIN | 9.89,34.02 9.89,30.43 19.17,21.14 21.08,21.14 22.27,19.95 22.27,18.56 27.13,13.7 J1.1 27.13,8.63 24.86,6.37 24.86,2.49 25.77,1.59 | U2.3 66.61,68.02 67.31,67.32 | IC1.8 14.61,36.11 11.78,36.11 9.89,34.21 9.89,34.02 | 67.31,45.1 67.31,43.75 64.77,41.21
  Bottom 0.635: v41.46,30.03 41.27,29.84 v37.55,29.84
  Bottom 1.143: R7.2 16.17,52.07 16.17,49.35 v15.92,49.11 12.63,49.11 9.65,46.13 | 9.65,46.13 3.81,40.28 3.81,39.71 C6.1 | 54.15,78.32 54.99,79.16 58.17,79.16 C3.1 | U$3.VIN 54.15,78.32 | 54.15,78.32 34.9,78.32 | 34.9,78.32 25.96,78.32 20.42,78.32 18.77,76.67 18.77,69.07 14.22,64.52 13.97,64.52 U$2.VDD | 9.65,46.13 9.05,46.72 v9.05,47.78 | J3.1 34.81,78.41 34.9,78.32
WSS_CLK  (via drill 0.55 pad 0.96)
  Top 0.508: IC8.CLKOUT 4.26,45.89 5.77,44.38 v9.99,44.38 | IC2.11 27.05,50.16 24.54,47.66 v24.54,47.26
  Bottom 0.508: v24.54,47.26 12.87,47.26 v9.99,44.38
WSS_DELAY  (via drill 0.55 pad 0.96)
  Top 0.508: IC5.6 14.9,52.7 21.23,46.37 21.49,46.37 | 21.49,46.37 24.91,46.37 27.05,48.51 27.05,48.9 IC2.10 | v20.42,45.51 20.42,46.37 21.49,46.37 | IC3.10 29.9,34.92 30.12,34.7 v30.12,33.89 | IC4.10 29.59,20.95 29.48,20.84 v29.09,20.84
  Bottom 0.508: 25.82,33.89 25.92,33.89 v30.12,33.89 | 25.82,33.89 25.78,33.89 20.42,39.25 v20.42,45.51 | 25.82,33.89 25.82,23.08 28.06,20.84 v29.09,20.84
WSS_LATCH_EN  (via drill 0.55 pad 0.96)
  Top 0.508: U3.11 47.98,31.11 48.22,30.87 v48.88,30.87 | U1.11 47.98,45.09 48,45.1 v49.12,45.1 | v43.77,25.84 43.77,18.56 45.19,17.14 U4.11 47.98,17.14 49.4,15.72 67.72,15.72 68.51,16.51 IC7.1
  Bottom 0.508: 48.16,30.87 48.16,44.14 v49.12,45.1 | v43.77,25.84 48.16,30.23 48.16,30.87 | 48.16,30.87 v48.88,30.87

## Text on the board
bPlace: Lehigh Racing 2019-2020 / Front Wheel DAQ Module Rev 1 / Made in Mohler by Pixies